# EAGLE board DMC4627 (EAGLE 9.6.2)
Spring 2022 EE319K/EE319H This is the baseline PCB
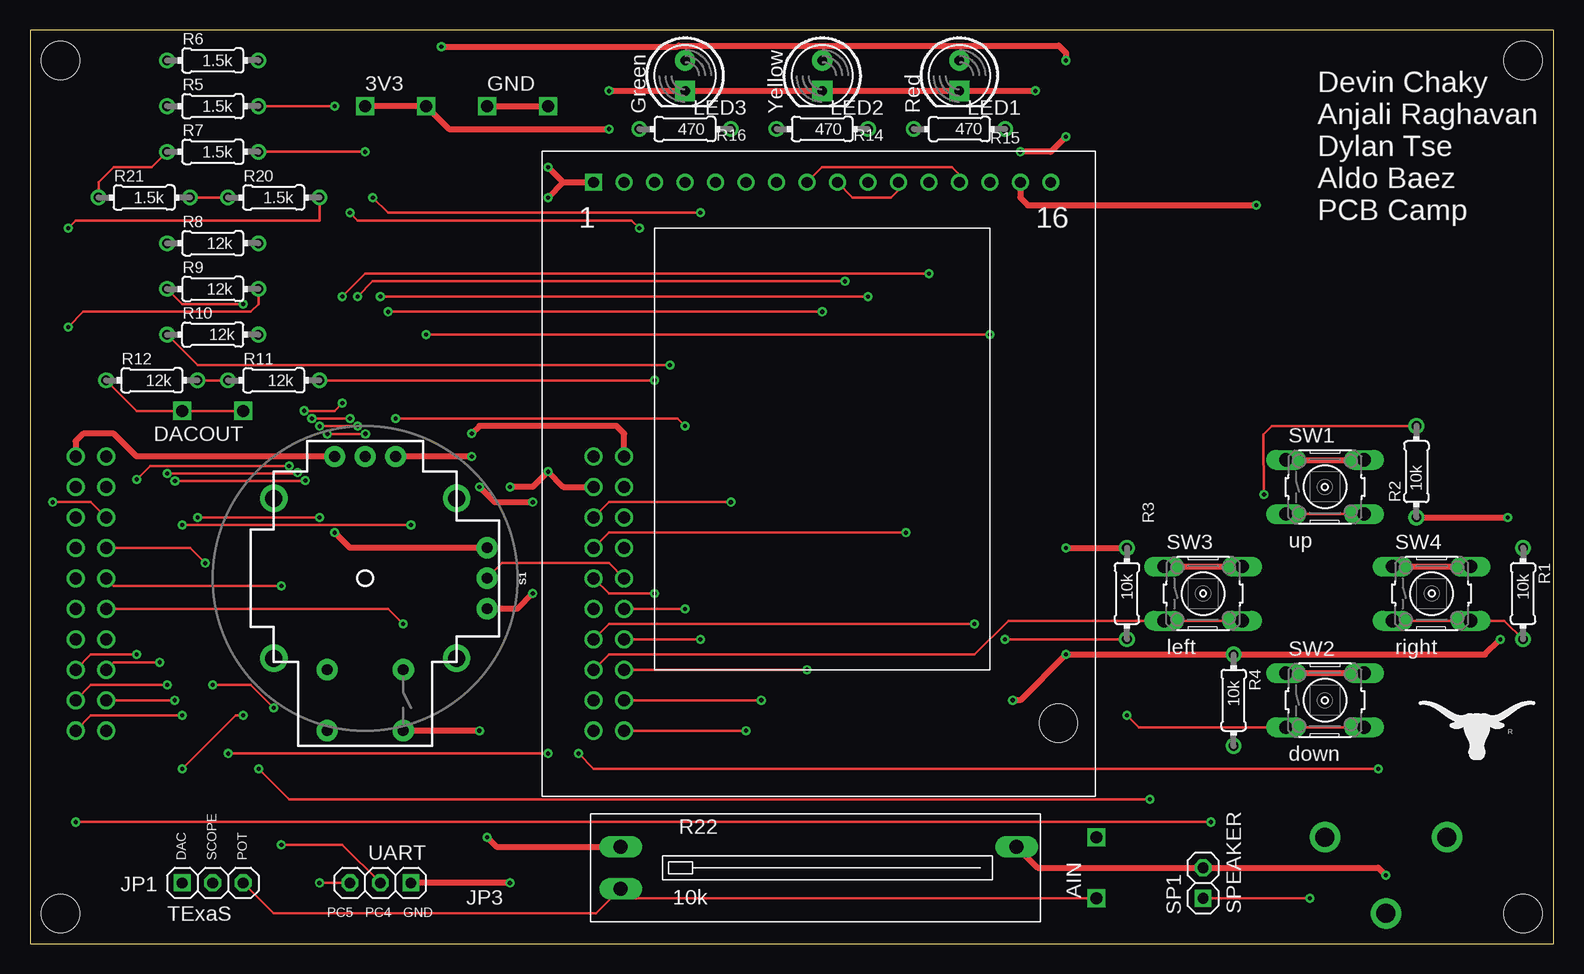
[diagram p0: board, top side]
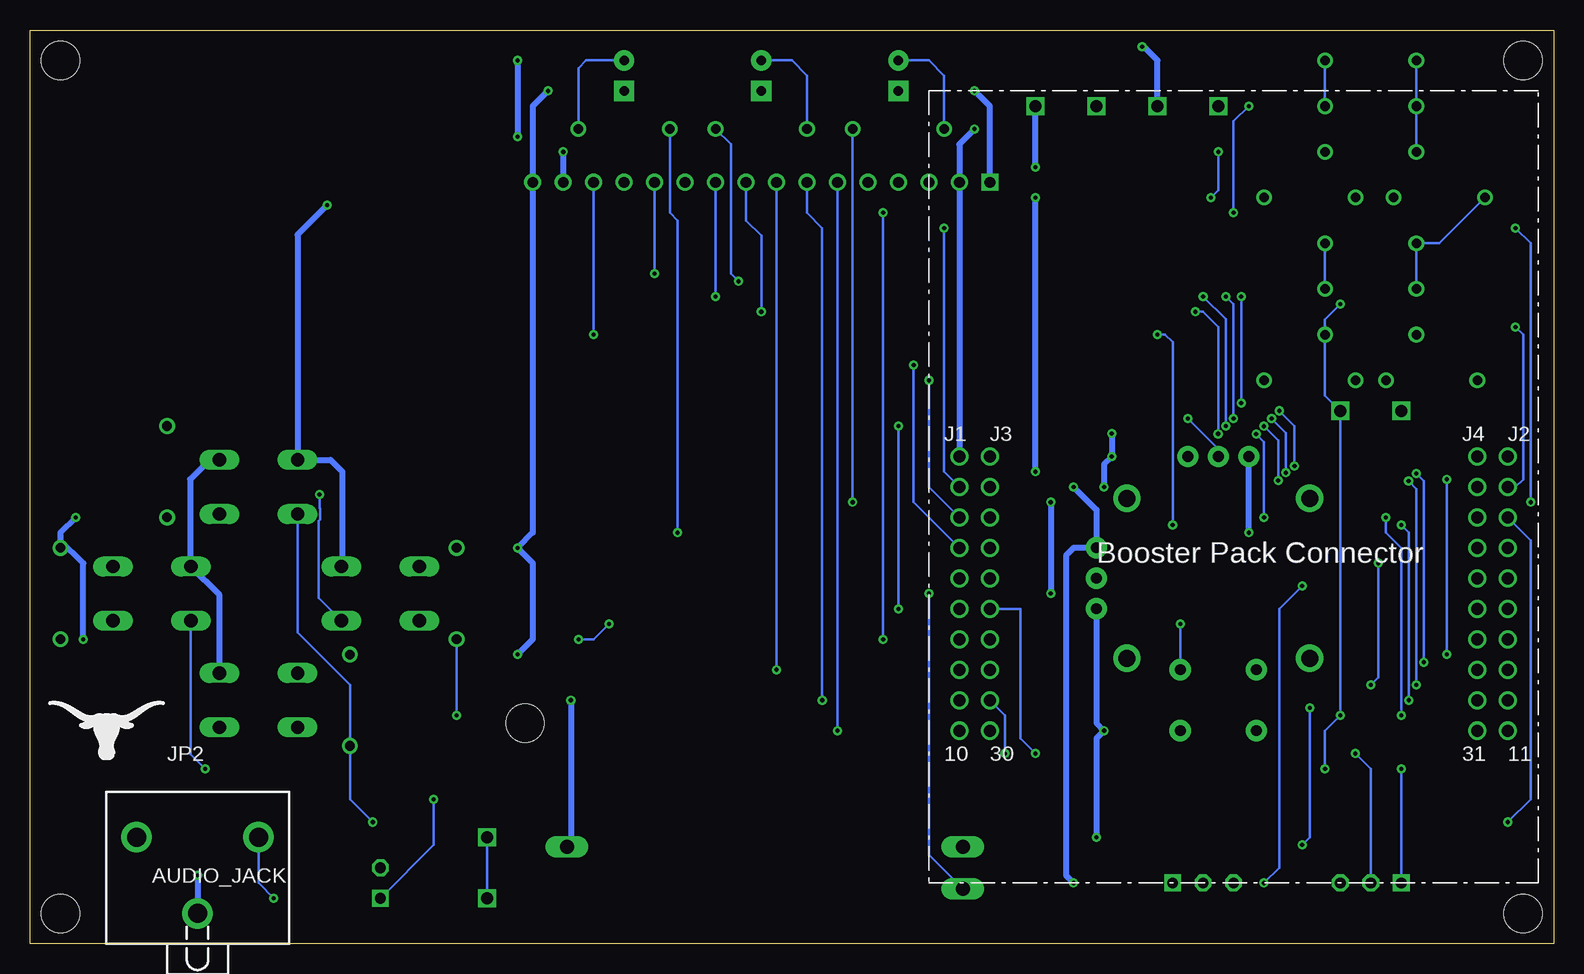
[diagram p1: board, bottom side, seen from below]

Size 127 x 76.2 mm. Coordinates in mm from the lower left corner, seen from the top.
Outline: 0,0 127,0 127,76.2 0,76.2 0,0
Copper layers (1*16): Top 0.035mm / dielectric 1.5mm / Bottom 0.035mm
Design rules "default": minimum track width 6mil, minimum drill 0.35mm, track to track 6mil, track to pad 6mil, pad to pad 6mil, via to via 6mil, smd to smd 6mil, copper to edge 40mil, drill to drill 6mil, minimum pad ring 10mil, minimum via ring 8mil, stop-mask expansion 4mil, vias tented up to drill 0mil, thermal gap 10mil
Holes 3.17 mm at 2.54,73.66 124.46,73.66 124.46,2.54 2.54,2.54

## Footprints (pad centres in the part's own frame; a part is rotated, then mirrored left to right if it is on the bottom)
TP_LOOP = drill 1 square: P$1 0,0; P$2 5.08,0
1X03 = drill 0.9 square: 1 -2.54,0 | drill 0.9 octagon: 2 0,0; 3 2.54,0
JACK = drill 1.587 pad 2.54: 1 -5.08,2.54; 2 5.08,2.54; 3 0,-3.81
LED5MM = drill 0.8 pad 1.676: A -1.27,0 | drill 0.8 pad 1.676 square: K 1.27,0
RES300MIL = drill 0.8: 1 -3.81,0; 2 3.81,0
PTA2043 = drill 1.194 long: 1 -13,1.75; 2 -13,-1.75; 3 20,1.75
JOYSTICK = drill 0.9 pad 1.778: B1A -3.175,12.7; B1B 3.175,12.7; B2A -3.175,7.62; B2B 3.175,7.62 | drill 0.889 pad 1.778: H1 -2.54,-10.16; H2 0,-10.16; H3 2.54,-10.16; V1 -10.16,2.54; V2 -10.16,0; V3 -10.16,-2.54 | drill 1.397 pad 2.286: MOUNT1 -7.62,6.668; MOUNT2 -7.62,-6.668; MOUNT3 7.62,-6.668; MOUNT4 7.62,6.668
1X02 = drill 0.9 square: 1 -1.27,0 | drill 0.9 octagon: 2 1.27,0
HILETGO = drill 0.9 square: 1 -20.32,25.4 | drill 0.9: 2 -17.78,25.4; 3 -15.24,25.4; 4 -12.7,25.4; 5 -10.16,25.4; 6 -7.62,25.4; 7 -5.08,25.4; 8 -2.54,25.4; 9 0,25.4; 10 2.54,25.4; 11 5.08,25.4; 12 7.62,25.4; 13 10.16,25.4; 14 12.7,25.4; 15 15.24,25.4; 16 17.78,25.4 | hole 3.175: 18.415,-19.685
B3F-10XX = drill 1.1 long: 1 -3.251,2.261; 2 3.251,2.261; 3 -3.251,-2.261; 4 3.251,-2.261
TM4C_BOOSTER_PACK = drill 1: J1-1 0,22.86; J1-2 0,20.32; J1-3 0,17.78; J1-4 0,15.24; J1-5 0,12.7; J1-6 0,10.16; J1-7 0,7.62; J1-8 0,5.08; J1-9 0,2.54; J1-10 0,0; J2-11 45.72,0; J2-12 45.72,2.54; J2-13 45.72,5.08; J2-14 45.72,7.62; J2-15 45.72,10.16; J2-16 45.72,12.7; J2-17 45.72,15.24; J2-18 45.72,17.78; J2-19 45.72,20.32; J2-20 45.72,22.86; J3-21 2.54,22.86; J3-22 2.54,20.32; J3-23 2.54,17.78; J3-24 2.54,15.24; J3-25 2.54,12.7; J3-26 2.54,10.16; J3-27 2.54,7.62; J3-28 2.54,5.08; J3-29 2.54,2.54; J3-30 2.54,0; J4-31 43.18,0; J4-32 43.18,2.54; J4-33 43.18,5.08; J4-34 43.18,7.62; J4-35 43.18,10.16; J4-36 43.18,12.7; J4-37 43.18,15.24; J4-38 43.18,17.78; J4-39 43.18,20.32; J4-40 43.18,22.86

## Placement (x,y rotation side)
3V3  TP_LOOP  [TP_LOOP]  27.94,69.85 0 top
AIN  TP_LOOP  [TP_LOOP]  88.9,3.81 90 top
DACOUT  TP_LOOP  [TP_LOOP]  17.78,44.45 180 top
GND  TP_LOOP  [TP_LOOP]  38.1,69.85 0 top
JP1  TExaS  [1X03]  15.24,5.08 0 top
JP2  AUDIO_JACK  [JACK]  113.03,6.35 0 bottom
JP3  UART  [1X03]  29.21,5.08 180 top
LED1  Red  [LED5MM]  77.47,72.39 270 top
LED2  Yellow  [LED5MM]  66.04,72.39 270 top
LED3  Green  [LED5MM]  54.61,72.39 270 top
R1  10k  [RES300MIL]  124.46,29.21 270 top
R2  10k  [RES300MIL]  115.57,39.37 90 top
R3  10k  [RES300MIL]  91.44,29.21 270 top
R4  10k  [RES300MIL]  100.33,20.32 270 top
R5  1.5k  [RES300MIL]  15.24,69.85 180 top
R6  1.5k  [RES300MIL]  15.24,73.66 180 top
R7  1.5k  [RES300MIL]  15.24,66.04 180 top
R8  12k  [RES300MIL]  15.24,58.42 180 top
R9  12k  [RES300MIL]  15.24,54.61 180 top
R10  12k  [RES300MIL]  15.24,50.8 0 top
R11  12k  [RES300MIL]  20.32,46.99 180 top
R12  12k  [RES300MIL]  10.16,46.99 180 top
R14  470  [RES300MIL]  66.04,67.94 180 top
R15  470  [RES300MIL]  77.47,67.94 0 top
R16  470  [RES300MIL]  54.61,67.94 180 top
R20  1.5k  [RES300MIL]  20.32,62.23 180 top
R21  1.5k  [RES300MIL]  9.53,62.23 180 top
R22  10k  [PTA2043]  62.23,6.35 0 top
S1  JOYSTICK_THUMB  [JOYSTICK]  27.94,30.48 180 top
SP1  SPEAKER  [1X02]  97.79,5.08 90 top
ST7735_LCD  HILETGO  [HILETGO]  67.31,38.1 0 top
SW1  up  [B3F-10XX]  107.95,38.1 0 top
SW2  down  [B3F-10XX]  107.95,20.32 0 top
SW3  left  [B3F-10XX]  97.79,29.21 0 top
SW4  right  [B3F-10XX]  116.84,29.21 0 top
U$2  TM4C_BP  [TM4C_BOOSTER_PACK]  49.53,17.78 0 bottom

## Library data of the parts
3V3 AIN DACOUT GND JP1 JP3 LED1-LED3 R1-R12 R14-R16 R20-R22 SP1 ST7735_LCD U$2 = EE445L
JP2 = EE445L; OC_FARNELL: unknown; OC_NEWARK: unknown
S1 = SparkFun-Switches; PROD_ID: COMP-09744; SF_SKU: COM-09032
SW1-SW4 = EE445L; MPN: B3F-1000; OC_FARNELL: 176432; OC_NEWARK: 36M3542

## Nets
+3V3: 3V3.P$1 3V3.P$2 R22.1 S1.B1A S1.H1 S1.V1 ST7735_LCD.2 ST7735_LCD.15 SW1.1 SW1.2 SW2.1 SW2.2 SW3.1 SW3.2 SW4.1 SW4.2 U$2.J1-1
+5V: U$2.J3-21
BLUE_LED: U$2.J4-40
DACOUT: DACOUT.P$1 DACOUT.P$2 JP1.1 JP2.2 R5.2 R6.2 R7.2 R8.2 R9.2 R10.2 R12.2 R21.2 SP1.1
GND: GND.P$1 GND.P$2 JP2.3 JP3.1 LED1.K LED2.K LED3.K R1.1 R2.1 R3.1 R4.1 R22.3 S1.H3 S1.V3 SP1.2 ST7735_LCD.1 ST7735_LCD.16 U$2.J2-20 U$2.J3-22
GREEN: LED3.A R16.2
GRN_LED: U$2.J4-39
LAUNCH_PAD_SW1: U$2.J4-31
LAUNCH_PAD_SW2: U$2.J2-17
PB0: R11.1 U$2.J1-3
PB1: R10.1 U$2.J1-4
PB2: R8.1 R9.1 U$2.J2-19
PB3: R20.1 U$2.J4-38
PB4: R7.1 U$2.J1-7
PB5: R5.1 R6.1 U$2.J1-2
PB6: U$2.J2-14
PB7: U$2.J2-15
PC4: JP3.2 U$2.J4-37
PC5: JP3.3 U$2.J4-36
PC6: S1.B2A U$2.J4-35
PC7: U$2.J4-34
PD0: R16.1 U$2.J3-23
PD1: R15.1 U$2.J3-24
PD2: AIN.P$1 AIN.P$2 JP1.3 R22.2 U$2.J3-25
PD3: JP1.2 U$2.J3-26
PD6: R14.1 U$2.J4-33
PD7: ST7735_LCD.14 U$2.J4-32
PE0: R4.2 SW1.3 SW1.4 U$2.J2-18
PE1: R3.2 SW2.3 SW2.4 U$2.J3-27
PE2: R2.2 SW3.3 SW3.4 U$2.J3-28
PE3: R1.2 SW4.3 SW4.4 U$2.J3-29
PE4: S1.V2 U$2.J1-5
PE5: S1.H2 U$2.J1-6
R11_R12: R11.2 R12.1
R20_R21: R20.2 R21.1
RED: LED1.A R15.2
RED_LED: U$2.J3-30
RESET: U$2.J2-16
ST7735_MISO: ST7735_LCD.12 U$2.J2-13
ST7735_MOSI: ST7735_LCD.8 ST7735_LCD.13 U$2.J1-8
ST7735_RESET: ST7735_LCD.6 U$2.J1-10
ST7735_SCK: ST7735_LCD.9 ST7735_LCD.11 U$2.J2-11
ST7735_TFTCS: ST7735_LCD.10 U$2.J2-12
ST7735_TFTDC: ST7735_LCD.7 U$2.J1-9
YELLOW: LED2.A R14.2

## Tracks (layer width: path | path; a pad name or v marks a point on that pad's centre or on a via)
+3V3  (via drill 0.35)
  Top 0.508: v34.29,74.81 54,74.81 54.09,74.91 85.75,74.91 86.36,74.3 v86.36,73.66 | v86.36,67.31 85.09,66.04 v82.55,66.04 | ST7735_LCD.15 82.55,62.23 83.19,61.59 v102.23,61.59 | SW1.1 SW1.2 | SW4.1 SW4.2 | SW3.1 SW3.2 | SW2.1 SW2.2 | v48.26,67.94 34.92,67.94 3V3.P$2 3V3.P$1 | U$2.J1-1 49.53,42.55 48.9,43.18 37.47,43.18 v36.83,42.55 | v36.83,40.64 S1.H1 | v37.47,38.1 38.73,36.83 v41.91,36.83 | v41.91,29.21 40.64,27.94 S1.V1 | v37.47,17.78 S1.B1A | v38.1,8.89 38.89,8.1 R22.1
  Bottom 0.508: 3V3.P$2 33.02,73.66 34.17,74.81 v34.29,74.81 | v86.36,73.66 v86.36,67.31 | v82.55,66.04 ST7735_LCD.15 | v102.23,61.59 104.7,59.13 SW1.1 101.96,40.36 100.97,39.37 100.97,31.55 SW3.2 | SW1.2 112.04,40.36 113.67,38.73 113.67,31.55 SW4.1 111.2,29.08 SW2.2 | v48.26,67.94 49.53,66.67 ST7735_LCD.2 U$2.J1-1 | v36.83,42.55 v36.83,40.64 37.47,40.01 v37.47,38.1 | v41.91,36.83 v41.91,29.21 | S1.V1 38.1,18.41 v37.47,17.78 38.1,17.14 v38.1,8.89
DACOUT  (via drill 0.35)
  Top 0.203: R7.2 10.16,64.77 6.99,64.77 5.71,63.5 R21.2 | R9.2 12.7,53.34 v17.78,53.34 | R12.2 8.89,44.45 DACOUT.P$2 DACOUT.P$1 | v12.7,14.61 17.14,19.05 v17.78,19.05 | v19.05,14.61 21.59,12.06 v93.34,12.06 | SP1.1 v106.68,3.81
  Bottom 0.203: R9.2 R8.2 9.53,58.42 R21.2 | R6.2 R5.2 R7.2 | v17.78,53.34 19.05,52.07 R10.2 19.05,45.72 DACOUT.P$1 v17.78,19.05 19.05,17.78 v19.05,14.61 | JP1.1 v12.7,14.61 | v93.34,12.06 93.34,8.26 SP1.1 | v106.68,3.81 107.95,5.08 JP2.2
GND  (via drill 0.35)
  Top 0.508: U$2.J3-22 44.45,38.1 v43.18,39.37 41.91,38.1 v40.01,38.1 | v83.82,71.12 LED1.K LED2.K LED3.K v48.26,71.12 | v43.18,64.77 44.45,63.5 | v43.18,62.23 44.45,63.5 | 44.45,63.5 ST7735_LCD.1 | v86.36,33.02 R3.1 | R2.1 v123.19,35.56 | v81.92,20.32 82.55,20.32 v86.36,24.13 R4.1 121.28,24.13 v122.56,25.4 | R22.3 83.98,6.35 SP1.2 112.39,6.35 v113.03,5.71 | GND.P$1 GND.P$2 | S1.V3 26.67,33.02 v25.4,34.29 | v40.01,5.08 JP3.1 | S1.H3 8.89,40.64 6.99,42.55 4.45,42.55 3.81,41.91 U$2.J2-20
  Bottom 0.508: v43.18,64.77 GND.P$2 | v43.18,39.37 v43.18,62.23 | v83.82,71.12 85.09,69.85 ST7735_LCD.16 85.09,34.29 v86.36,33.02 85.09,31.75 85.09,25.4 v86.36,24.13 | ST7735_LCD.1 46.99,69.85 v48.26,71.12 | v123.19,35.56 124.46,34.29 124.46,33.66 | 124.46,33.66 R1.1 | v81.92,20.32 81.92,8.41 R22.3 | v113.03,5.71 JP2.3 | v40.01,38.1 38.1,36.2 S1.V3 40.01,33.02 40.64,32.38 40.64,5.71 v40.01,5.08 | v25.4,34.29 S1.H3 | v122.56,25.4 122.56,31.75 124.46,33.66
GREEN
  Bottom 0.203: R16.2 50.8,72.39 52.07,73.66 LED3.A
PB0  (via drill 0.35)
  Top 0.203: v52.07,46.99 R11.1
  Bottom 0.203: U$2.J1-3 52.07,38.1 v52.07,46.99
PB1  (via drill 0.35)
  Top 0.203: v53.34,48.26 13.97,48.26 R10.1
  Bottom 0.203: U$2.J1-4 53.34,36.83 v53.34,48.26
PB2  (via drill 0.35)
  Top 0.203: v3.17,51.44 4.45,52.7 18.41,52.7 19.05,53.34 R9.1
  Bottom 0.203: R8.1 R9.1 | U$2.J2-19 3.17,38.1 2.54,38.73 2.54,50.8 v3.17,51.44
PB3  (via drill 0.35)
  Top 0.203: U$2.J4-38 5.08,36.83 v1.91,36.83 | v3.17,59.69 3.81,60.33 24.13,60.33 R20.1
  Bottom 0.203: v1.91,36.83 1.91,58.42 v3.17,59.69
PB4  (via drill 0.35)
  Top 0.203: U$2.J1-7 v55.88,25.4 | v55.88,60.96 29.84,60.96 v28.57,62.23 | v27.94,66.04 R7.1
  Bottom 0.203: v28.57,62.23 27.94,62.87 v27.94,66.04 | v55.88,25.4 v55.88,60.96
PB5  (via drill 0.35)
  Top 0.203: v50.8,59.69 50.16,60.33 27.3,60.33 v26.67,60.96 | v25.4,69.85 R5.1
  Bottom 0.203: U$2.J1-2 50.8,39.37 v50.8,59.69 | v25.4,69.85 26.67,68.58 v26.67,60.96 | R5.1 R6.1
PC4  (via drill 0.35)
  Top 0.203: U$2.J4-37 13.34,33.02 v14.61,31.75 | v15.24,21.59 18.41,21.59 v20.32,19.68 | v20.95,8.26 26.04,8.26 JP3.2
  Bottom 0.203: v14.61,31.75 14.61,22.23 v15.24,21.59 | v20.32,19.68 20.32,8.89 v20.95,8.26
PC5  (via drill 0.35)
  Top 0.203: U$2.J4-36 6.99,29.84 v20.95,29.84 | v24.13,5.08 JP3.3
  Bottom 0.203: v20.95,29.84 22.86,27.94 22.86,6.35 v24.13,5.08
PC6  (via drill 0.35)
  Top 0.203: U$2.J4-35 29.84,27.94 v31.11,26.67
  Bottom 0.203: v31.11,26.67 S1.B2A
PD0  (via drill 0.35)
  Top 0.203: U$2.J3-23 48.26,36.83 v58.42,36.83
  Bottom 0.203: v58.42,36.83 R16.1
PD1  (via drill 0.35)
  Top 0.203: U$2.J3-24 48.26,34.29 v73.03,34.29
  Bottom 0.203: v73.03,34.29 73.03,60.33 73.66,60.96 R15.1
PD2  (via drill 0.35)
  Top 0.203: JP1.3 20.32,2.54 47.17,2.54 R22.2 50.02,3.81 AIN.P$1 | v52.07,29.21 48.26,29.21 U$2.J3-25
  Bottom 0.203: AIN.P$1 AIN.P$2 | R22.2 52.07,7.44 v52.07,29.21
PD3  (via drill 0.35)
  Top 0.203: v16.51,15.88 v43.18,15.88
  Bottom 0.203: JP1.2 15.24,14.61 v16.51,15.88 | v43.18,15.88 44.45,17.14 44.45,27.94 U$2.J3-26
PD6  (via drill 0.35)
  Top 0.203: U$2.J4-33 6.98,23.49 v10.8,23.49 | v11.43,39.22 22.24,39.22 v22.31,39.29 | v23.5,43.81 v23.51,43.81 v26.67,43.81 | v27.3,53.98 28.57,55.24 v67.94,55.24
  Bottom 0.203: v10.8,23.49 10.8,38.6 v11.43,39.22 | v22.31,39.29 22.31,42.61 v23.5,43.81 | v26.67,43.81 26.67,53.34 v27.3,53.98 | v67.94,55.24 68.58,55.88 68.58,66.67 R14.1
PD7  (via drill 0.35)
  Top 0.203: U$2.J4-32 v12.06,20.32 | v12.7,34.92 v31.75,34.92 | v33.02,50.8 v80.01,50.8
  Bottom 0.203: v12.06,20.32 12.06,34.29 v12.7,34.92 | v31.75,34.92 31.75,50.16 32.38,50.8 v33.02,50.8 | v80.01,50.8 ST7735_LCD.14
PE0  (via drill 0.35)
  Top 0.203: v3.81,10.16 v98.42,10.16 | SW1.3 SW1.4
  Bottom 0.203: U$2.J2-18 1.91,33.66 1.91,12.06 v3.81,10.16 | v98.42,10.16 100.33,12.06 R4.2 100.33,21.59 104.7,25.96 SW1.3
PE1  (via drill 0.35)
  Top 0.203: SW2.4 SW2.3 92.43,18.06 v91.44,19.05 | R3.2 v81.28,25.4 | v78.74,26.67 48.26,26.67 U$2.J3-27
  Bottom 0.203: v91.44,19.05 R3.2 | v81.28,25.4 80.01,25.4 v78.74,26.67
PE2  (via drill 0.35)
  Top 0.203: U$2.J3-28 48.26,24.13 78.74,24.13 81.56,26.95 SW3.3 SW3.4 | v102.87,37.47 102.87,39.84 102.8,39.91 102.8,42.47 103.5,43.18 R2.2
  Bottom 0.203: v102.87,37.47 102.87,36.36 102.8,36.29 102.8,35.39 102.94,35.24 102.94,28.85 SW3.4
PE3  (via drill 0.35)
  Top 0.203: SW4.3 SW4.4 122.91,26.95 R1.2 | v112.39,14.61 46.99,14.61 v45.72,15.88
  Bottom 0.203: SW4.3 113.59,15.8 v112.39,14.61 | v45.72,15.88 45.72,19.05 U$2.J3-29
PE4
  Top 0.203: S1.V2 39.37,31.75 48.26,31.75 U$2.J1-5
PE5  (via drill 0.35)
  Top 0.203: U$2.J1-6 v54.61,27.94 | v54.61,43.18 53.98,43.81 v30.48,43.81
  Bottom 0.203: v54.61,27.94 v54.61,43.18 | v30.48,43.81 27.94,41.27 S1.H2
R11_R12
  Top 0.203: R12.1 R11.2
R20_R21
  Top 0.203: R21.1 R20.2
RED
  Bottom 0.203: R15.2 81.28,73.03 80.64,73.66 LED1.A
ST7735_MISO  (via drill 0.35)
  Top 0.203: U$2.J2-13 5.08,24.13 v8.89,24.13 | v8.89,38.73 10.01,39.85 v21.59,39.85 | v22.86,44.45 25.4,44.45 v26.04,45.09 | v74.93,55.88 27.94,55.88 v26.04,53.98
  Bottom 0.203: v21.59,39.85 21.59,43.18 v22.86,44.45 | v26.04,45.09 v26.04,53.98 | v74.93,55.88 ST7735_LCD.12 | v8.89,24.13 v8.89,38.73
ST7735_MOSI  (via drill 0.35)
  Top 0.203: U$2.J1-8 v64.77,22.86 | ST7735_LCD.8 66.04,64.77 76.83,64.77 77.47,64.14 ST7735_LCD.13
  Bottom 0.203: v64.77,22.86 ST7735_LCD.8
ST7735_RESET  (via drill 0.35)
  Top 0.203: U$2.J1-10 v59.69,17.78
  Bottom 0.203: v59.69,17.78 ST7735_LCD.6
ST7735_SCK  (via drill 0.35)
  Top 0.203: U$2.J2-11 5.08,19.05 v12.7,19.05 | v13.97,35.56 v24.13,35.56 | v24.79,42.52 27.95,42.52 v27.95,42.53 | v29.84,52.7 v66.04,52.7 | ST7735_LCD.9 68.58,62.23 71.75,62.23 72.39,62.87 ST7735_LCD.11
  Bottom 0.203: v12.7,19.05 12.7,33.02 13.97,34.29 v13.97,35.56 | v24.13,35.56 24.13,41.86 v24.79,42.52 | v27.95,42.53 27.95,51.42 29.24,52.7 v29.84,52.7 | v66.04,52.7 66.04,59.05 67.31,60.33 ST7735_LCD.9
ST7735_TFTCS  (via drill 0.35)
  Top 0.203: U$2.J2-12 5.08,21.59 v11.43,21.59 | v12.08,38.59 22.9,38.59 v22.95,38.65 | v24.14,43.16 24.15,43.17 v27.31,43.17 | v29.21,53.98 v69.85,53.98
  Bottom 0.203: v11.43,21.59 11.43,23.22 11.44,23.23 11.44,37.94 v12.08,38.59 | v22.95,38.65 22.95,41.97 v24.14,43.16 | v27.31,43.17 27.31,52.06 27.31,52.08 v29.21,53.98 | v69.85,53.98 ST7735_LCD.10
ST7735_TFTDC  (via drill 0.35)
  Top 0.203: U$2.J1-9 v60.96,20.32
  Bottom 0.203: v60.96,20.32 60.96,59.69 62.23,60.96 ST7735_LCD.7
YELLOW
  Bottom 0.203: R14.2 62.23,72.39 63.5,73.66 LED2.A

## Text on the board
tPlace: Devin Chaky / Anjali Raghavan / Dylan Tse / Aldo Baez / PCB Camp | R | DAC | SCOPE | POT | PC5 | PC4 | GND